# Altium PCB PS3604LP.PcbDoc
Units mm, origin at the board's own origin, x right, y up, seen from the top; angles counter-clockwise.
Board outline 32 x 20 mm, 2 copper layers (Top Layer, Bottom Layer), stack 1.571 mm thick; 6 components, 4 nets, 16 pads, 24 vias.
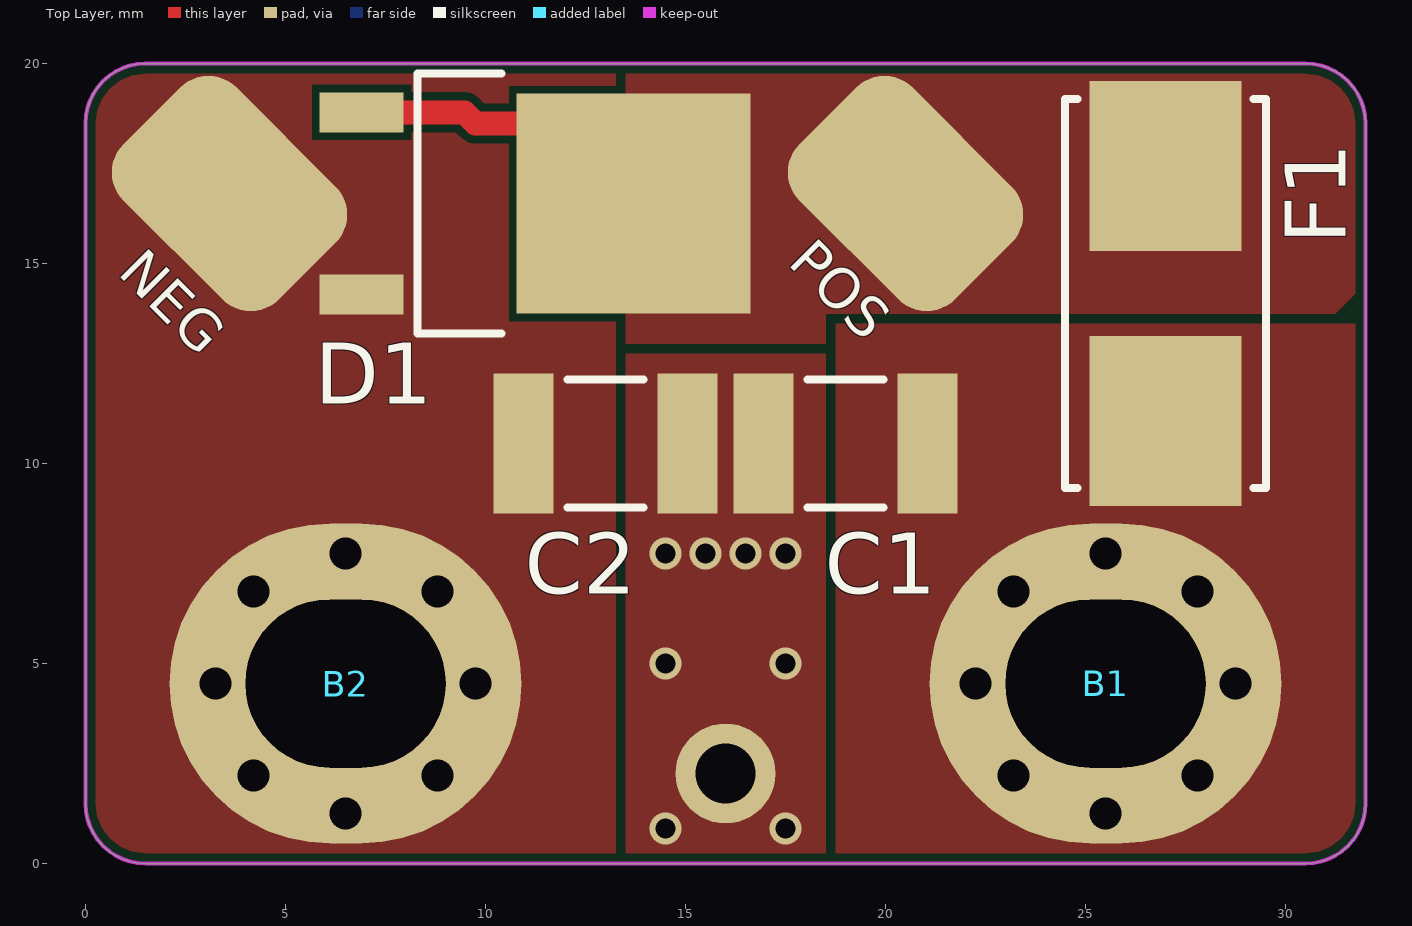
[diagram p0: Top Layer view]
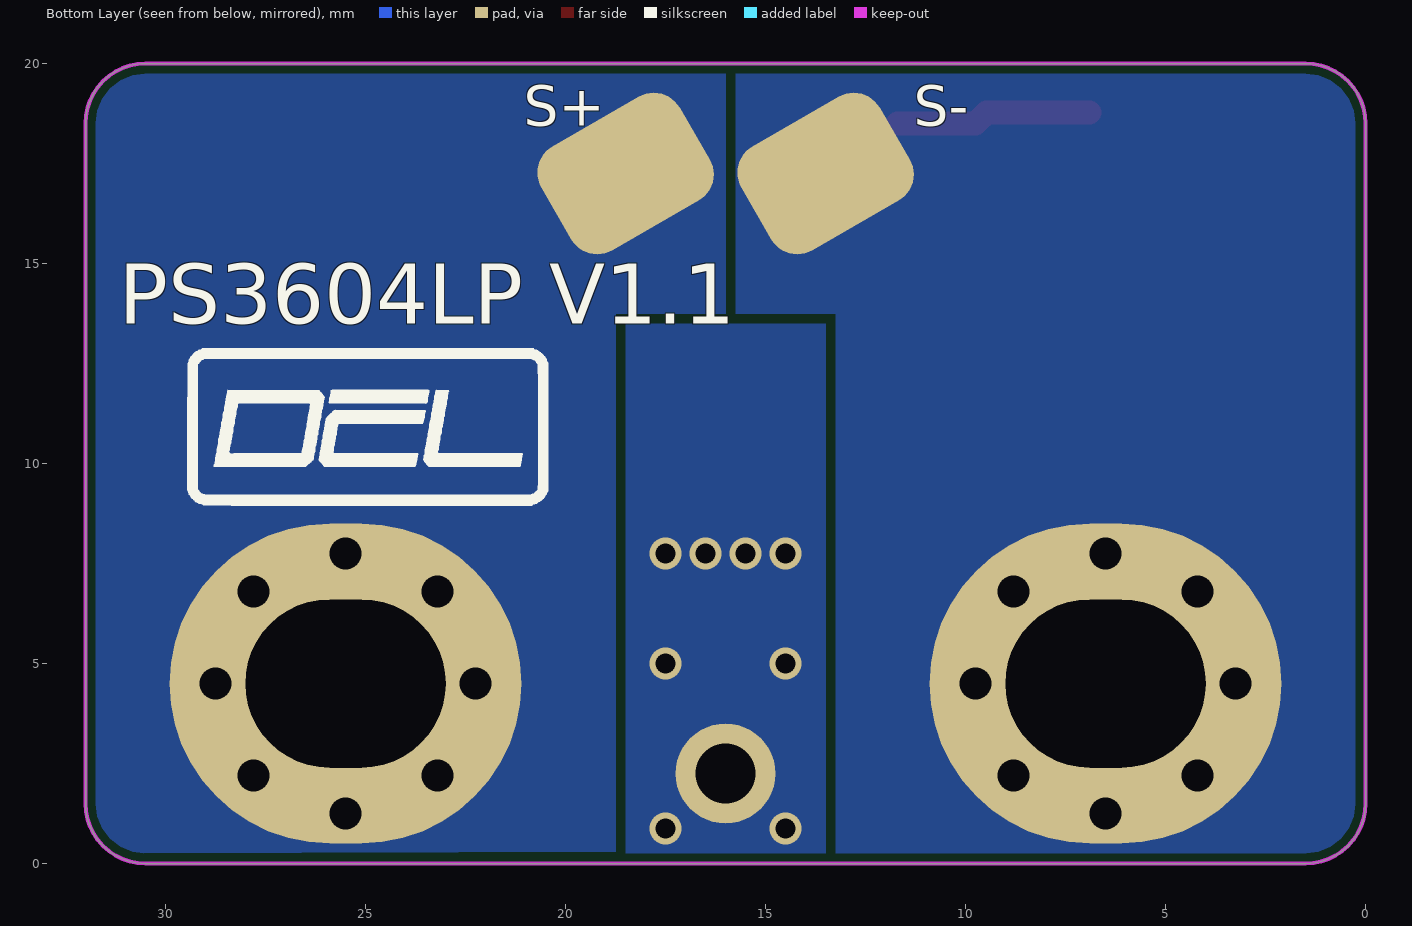
[diagram p1: Bottom Layer view, seen from below]
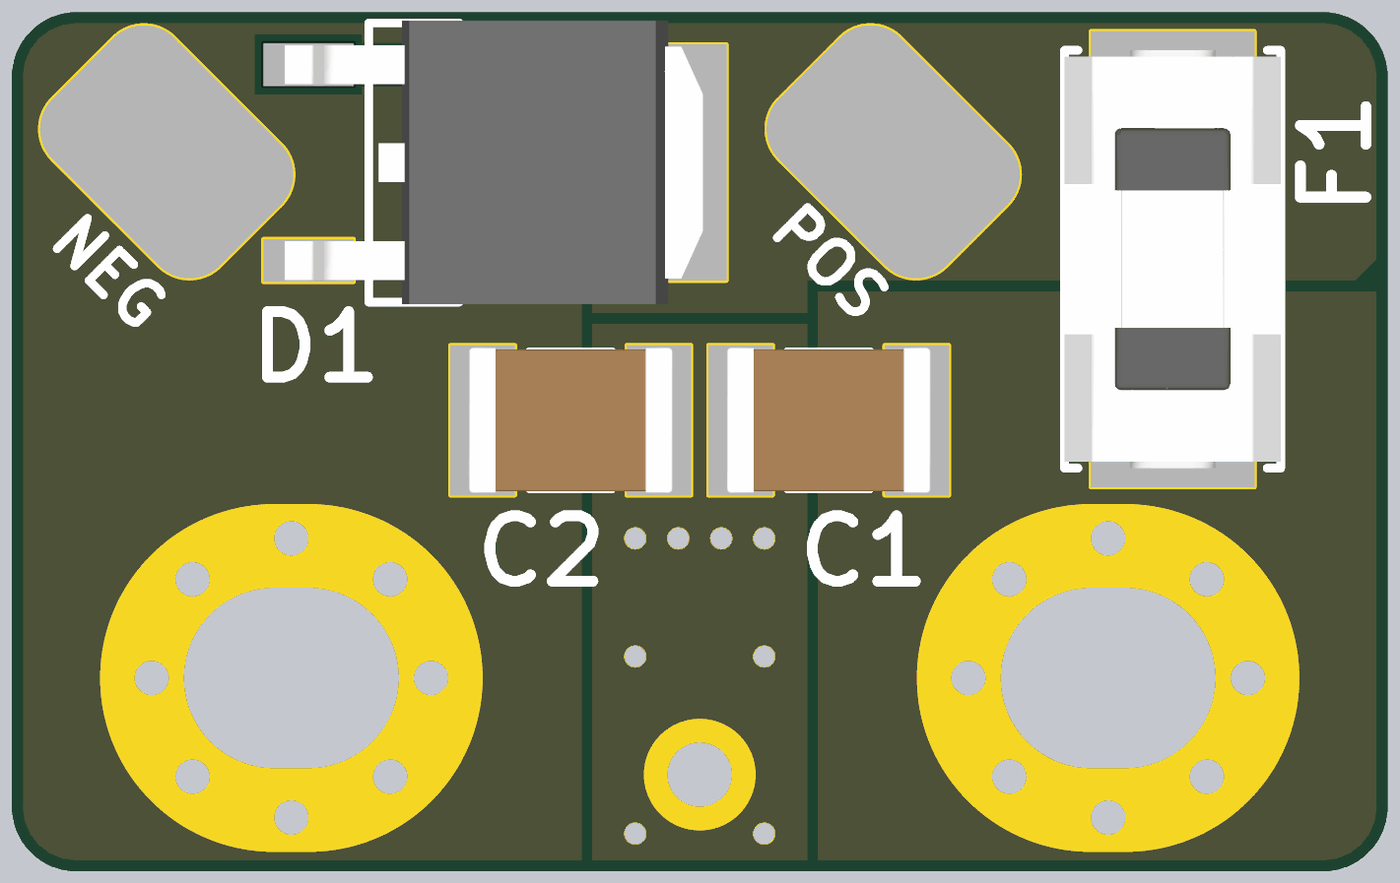
[diagram p2: 3D render of the assembled board from above, using the file's embedded part models]

## Layer stack, top to bottom
Top Solder: solder mask 0.0102, Solder Resist, Dk 3.5
Top Layer: signal copper 0.0356
Dielectric 1: dielectric 1.5, FR-4, Dk 4.8
Bottom Layer: signal copper 0.0356
Bottom Solder: solder mask 0.0102, Solder Resist, Dk 3.5

## Board outline
1.5,0 cw(c1.5,1.5) 0,1.5 0,18.5 cw(c1.5,18.5) 1.5,20 30.5,20 cw(c30.5,18.5) 32,18.5 32,1.5 cw(c30.5,1.5) 30.5,0

## Design rules (kind name [scope] priority, off if disabled: settings)
Clearance [All] p1: gap=0.2 ignorepadtopadclearanceinfootprint=FALSE except(0: Arc-Hole Track-Hole SMDPad-Hole THPad-Hole Via-Hole Fill-Hole Poly-Hole Region-Hole Text-Hole)
ComponentClearance [All] p1: gap=0 collisioncheckmode=3 verticalgap=0 showdistances=FALSE
HoleSize [All] p1: absolutevalues=TRUE maxlimit=6 minlimit=0.3 maxpercent=80.000 minpercent=20.000
HoleToHoleClearance [All] p1: gap=0.2 allowstackedmicrovias=TRUE
MinimumSolderMaskSliver [All] p1: minsoldermaskwidth=0.09
PolygonConnect PolygonConnectVia [IsVia] p1: connectstyle=Direct reliefconductorwidth=0.254 reliefentries=4 polygonreliefangle="90 Angle" airgapwidth=0.254
PolygonConnect [All] p2: connectstyle=Direct reliefconductorwidth=0.25 reliefentries=4 polygonreliefangle="90 Angle" airgapwidth=0.15
RoutingCorners [All] p1: cornerstyle=45-Degree minsetback=2.5 maxsetback=2.5
RoutingVias [All] p1: holewidth=0.3 width=1 viastyle="Through Hole" minholewidth=0.3 minwidth=0.03 maxholewidth=6 maxwidth=6
SilkToSilkClearance [All] p1: silktosilkclearance=0.1
SilkToSolderMaskClearance [IsPad] p1: minsilkscreentomaskgap=0.1 clearancetoexposedcopper=TRUE
SolderMaskExpansion [All] p1: expansion=0.05 istentingtop=FALSE
Width [All] p1: maxlimit=4 minlimit=0.2 preferedwidth=0.25
23 further rules are at their usual default settings.

## Components (designator, comment, footprint, x,y, rotation, side; value= is the part's Value field where it differs from the comment)
B1 "Plated Hole" MTG420_550 25.5,4.5 r0 top
B2 "Plated Hole" MTG420_550 6.5,4.5 r0 top
C1 "2.2n" CAPC4532X250N 19,10.5 r0 top
C2 "2.2n" CAPC4532X250N 13,10.5 r0 top
D1 "C3D04060E" TO228P972X240-3N-R540X510 11.25,16.5 r0 top
F1 "0.5A-125V" FUSE_LITTELFUSE_0154 27,14.25 r270 top

## Footprints (in the part's own frame and the unit in brackets; to place one, negate y for a bottom-side part, rotate by r counter-clockwise, add the part's x,y. Pads: shape width x height; smd on the part's side, far side on the other; paste and mask are expansions set on the pad)
CAPC4532X250N [mm] "Chip Capacitor, 2-Leads, Body 4.5x3.2mm, IPC Medium Density"
  rect 1.5x3.5 smd: 1(-2.05,0) 2(2.05,0)
  silkscreen extent -0.95,-1.6 0.95,1.6, body extent -2.37,-1.7 2.38,1.7, height 2.5
FUSE_LITTELFUSE_0154 [mm] "SMF Fuse and Holder, 2-Leads, Body 9.73x5.03mm"
  rect 4.245x3.81 smd: 1(-3.188,0) 2(3.188,0)
  silkscreen extent -4.87,-2.52 4.87,2.52, body extent -4.86,-2.51 4.87,2.52, height 3.81
MTG420_550 [mm] "Plated Through Hole: Hole Dia.=4.2mm Pad Dia.=5.5mm"
  oval 8.8x8 hole 4.2 slot 5 at 0 deg: 1(0,0)
TO228P972X240-3N-R540X510 [mm] "DPAK TO-252, 2.28mm pitch; 2 pin, 9.725mm L X 6.10mm W X 2.40mm H body, IPC Medium Density"
  rect 2.1x1 smd: 1(-4.35,2.28) 2(-4.35,-2.28)
  rect 5.85x5.5 smd: 3(2.45,0)
  silkscreen extent -2.95,-3.25 -0.85,3.25, body extent -4.9,-3.3 4.82,3.3, height 2.4

## Part data
B1 B2: library part PLATED_HOLE4.2_PAD5.5, "Single Terminal Socket", Author="CERN DEM JMW", Component Type="Standard (No BOM)", ComponentHeight=0mm, CreateDate=9/27/2011, Family="Plated Hole", LatestRevisionDate=9/27/2011, Mounted=No, PackageDescription="Plated Through Hole: Hole Dia.=4.2mm Pad Dia.=5.5mm", Part Description="Plated Through Hole: Hole Dia.=4.2mm Pad Dia.=5.5mm", Part Number=PLATED_HOLE4.2_PAD5.5, Pin Count=1, SMD=No, Socket=No, Status=None
C1 C2: library part CC1812_2.2NF_1000V_10%_X7R, "Non-polarised capacitor", Case=1812, Manufacturer=GENERIC, Manufacturer1 ComponentHeight=2.5mm, Manufacturer1 Example=SYFER, Manufacturer1 Part Number=1812Y5000104KXB, Tolerance=±10%, Voltage=1000V, Author=DEL, Component Type=Standard, CreateDate=10/9/2017, LatestRevisionDate=10/9/2017, Manufacturer Part Number=CC1812_2.2NF_1000V_10%_X7R, Mounted=Yes, Part Description="SMD Multilayer Chip Ceramic Capacitor", Part Number=CC1812_2.2NF_1000V_10%_X7R, Pin Count=2, SMD=Yes, Socket=No, Status=None, TC=X7R
D1: "Diode  Schottky Anode pin 1 and 2 cathode pin 3", Case=D-PACK, Manufacturer=CREE, Power=7.5A, Voltage=600V, Author=DEL, Component Type=Standard, ComponentHeight=2.39mm, CreateDate=9/13/2025, Device=C3D04060E, LatestRevisionDate=9/13/2025, Manufacturer Part Number=C3D04060E, Mounted=Yes, PackageDescription="DPAK TO-252, 2.28mm pitch; 2 pin, 9.725mm L X 6.10mm W X 2.40mm H body, IPC Medium Density", Part Description="Silicon Carbide Schottky Diode", Part Number=C3D04060E, Pin Count=3, SMD=Yes, Socket=No
F1: library part FUSE_LITTELFUSE_0154.500DR, "Fuse", Manufacturer=LITTELFUSE, Manufacturer Part Number=0154.500DR, Author="CERN DEM JMW", Component Type=Standard, ComponentHeight=3.81mm, CreateDate=1/8/2009, Family="Fuse & Holder", HelpURL=\\cern.ch\dfs\Applications\Altium\Datasheets\FUSE_LITTELFUSE_0154.pdf, LatestRevisionDate=1/8/2009, Mounted=Yes, PackageDescription="SMF Fuse and Holder, 2-Leads, Body 9.73x5.03mm", Part Description="SMF OMNI-BLOK® Very Fast-Acting Fuse and Holder", Part Number=FUSE_LITTELFUSE_0154.500DR, Pin Count=2, SMD=Yes, Socket=No

## Free pads (board coordinates)
  rrect50% 5.5x4 smd rot 135: 1(3.6,16.75) 2(20.5,16.75)
  rrect50% 4x3 smd far side rot 150: 3(13.5,17.25) 4(18.5,17.25)
  round 2.5 hole 1.5: 9(16,2.25)

## Via types
v1: diameter 1.1, hole 0.8, Top Layer to Bottom Layer, 16 vias
v2: diameter 0.8, hole 0.5, Top Layer to Bottom Layer, tented both sides, 8 vias

## Nets (pads, with @x,y where several pads share a name; then routed paths per layer and width w, separated by ;. In a path a pad name is that pad's centre, name@x,y a point inside that pad or via, vN(x,y) a via of type N, cw(c..) or ccw(c..) an arc to the next point about the centre after c; other vN are vias at no path point)
Earth: C1.1 C2.2 pad.9
  other v2: 14.5,0.876 17.5,0.876 14.5,5 17.5,5 14.5,7.75 15.5,7.75 16.5,7.75 17.5,7.75
NEG: B2.1 C2.1 D1.2 pad.1 pad.3
  other v1: 6.5,1.25 4.202,2.202 8.798,2.202 3.25,4.5 9.75,4.5 4.202,6.798 8.798,6.798 6.5,7.75
POS: D1.1 D1.3 F1.1 pad.2 | length 4.9
  Top Layer w0.6: D1.1 9.47,18.78 9.75,18.5 D1.3@11.7,18.5
S+: B1.1 C1.2 F1.2 pad.4
  other v1: 25.5,1.25 23.202,2.202 27.798,2.202 22.25,4.5 28.75,4.5 23.202,6.798 27.798,6.798 25.5,7.75

## Polygon pours and split planes (outlines as drawn)
POS on Top Layer "POS_L01_P003" (solid, pour order 3): 31.245,13.75 31.75,14.255 31.75,19.75 13.5,19.75 13.5,13 18.5,13 18.5,13.75
NEG on Top Layer "NEG_L01_P002" (solid, pour order 2): 0.25,0.255 13.25,0.25 13.25,19.75 0.25,19.75
Earth on Top Layer "EARTH_L01_P000" (solid, pour order 0): 13.5,12.75 18.5,12.75 18.5,0.25 13.5,0.25
S+ on Top Layer "S+_L01_P001" (solid, pour order 1): 18.75,0.25 31.75,0.25 31.75,13.5 18.75,13.5
NEG on Bottom Layer "NEG_L02_P006" (solid, pour order 6): 13.25,0.255 13.25,13.75 15.75,13.75 15.75,19.75 0.25,19.75 0.25,0.255
S+ on Bottom Layer "S+_L02_P007" (solid, pour order 7): 18.75,0.295 18.75,13.75 16,13.75 16,19.745 31.745,19.745 31.75,19.75 31.75,0.255
Earth on Bottom Layer "EARTH_L02_P004" (solid, pour order 4): 13.5,13.5 18.5,13.5 18.5,0.25 13.5,0.25

## Keep-outs
Keep-Out Layer:
  the board outline again, w0.1

## Silkscreen, mask and mechanical layers (free items; w line width, h text height)
Top Overlay:
  text "POS" at 17.533,15 h1 r315
  text "NEG" at 0.783,14.75 h1 r315
Bottom Overlay:
  drawing of 5 lines, arcs and shapes, not listed
  text "S-" at 11.3,18.45 h1
  text "S+" at 21.05,18.45 h1
  text "PS3604LP V1.1" at 31.173,13.5 h1.5

## Dimensions
1.5,20 to 1.5,0 on Mechanical 14
0,18.5 to 32,18.5 on Mechanical 14